# EAGLE board DualSerialHBridge-1.0 (EAGLE 6.4)
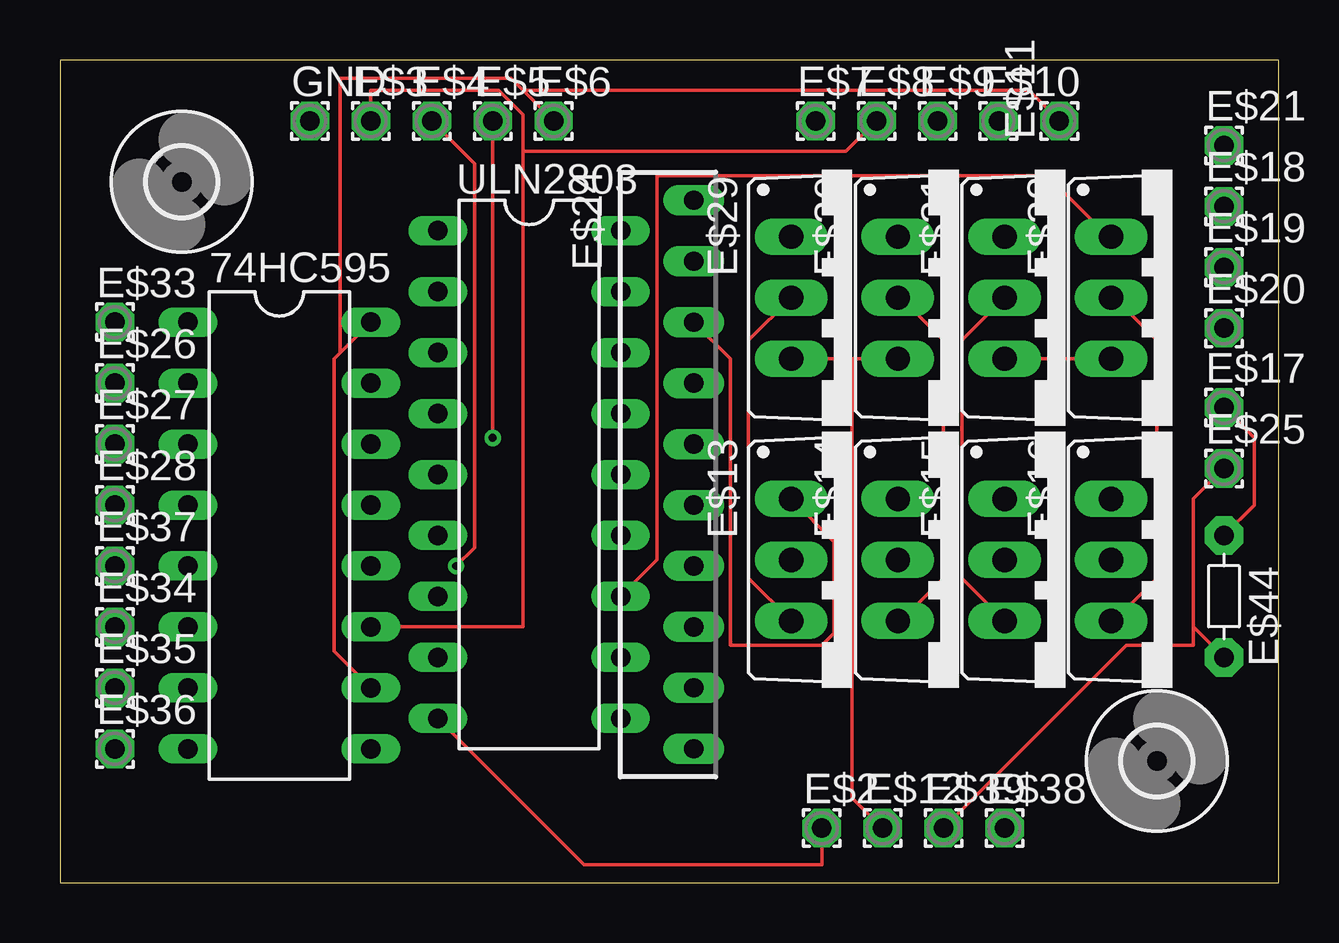
[diagram p0: board, top side]
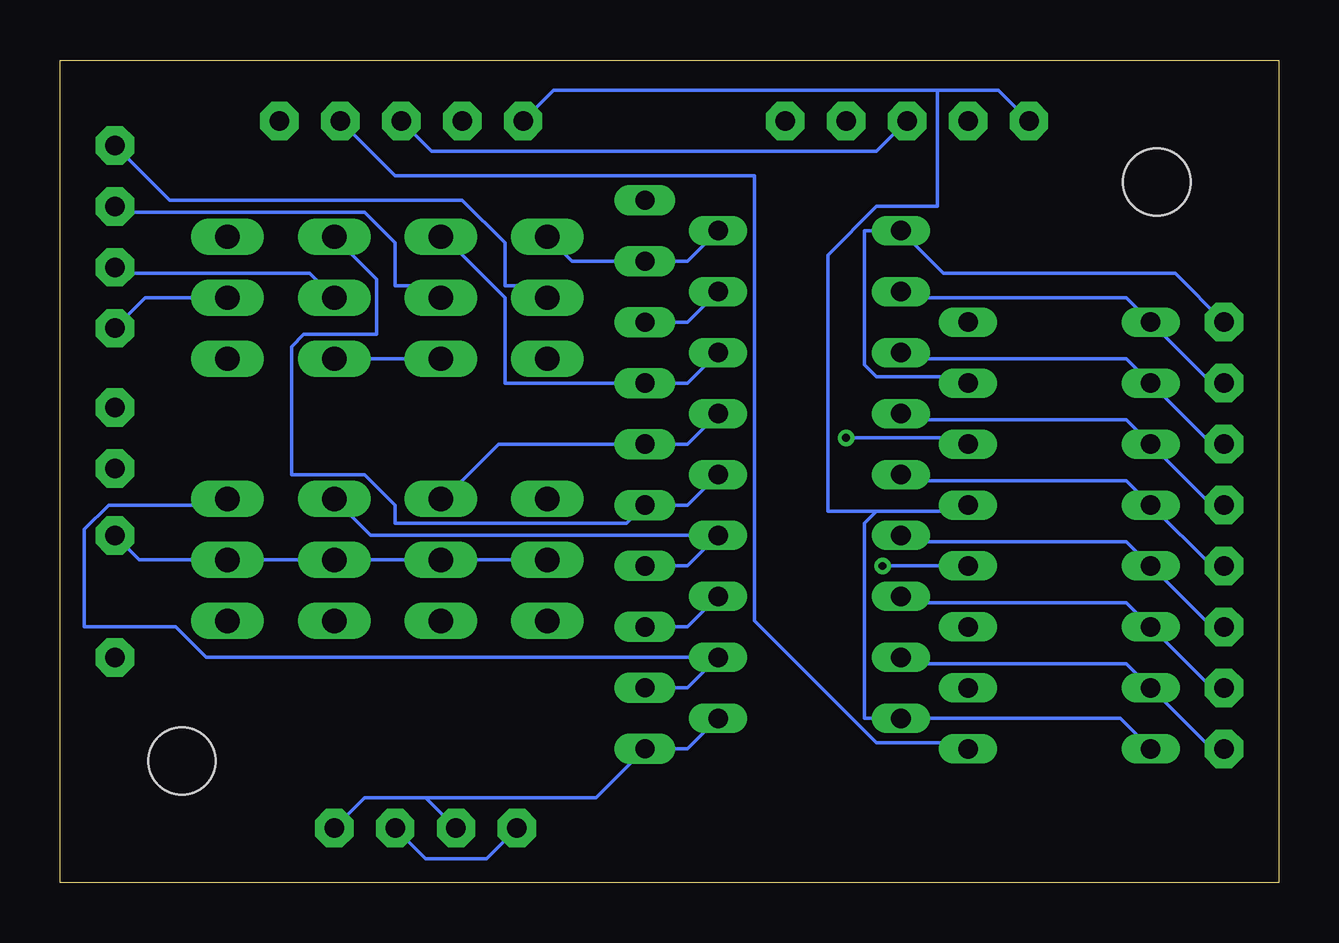
[diagram p1: board, bottom side, seen from below]

Size 50.8 x 34.29 mm. Coordinates in mm from the lower left corner, seen from the top.
Outline: 0,34.29 0,0 50.8,0 50.8,34.29 0,34.29
Copper layers (1*16): Top 0.0356mm / dielectric 1.5011mm / Bottom 0.0356mm
Design rules "LaenPCBOrder": minimum track width 6mil, minimum drill 13mil, track to track 6mil, track to pad 6mil, pad to pad 6mil, via to via 6mil, smd to smd 6mil, copper to edge 15mil, drill to drill 6mil, minimum pad ring 7mil, minimum via ring 7mil, stop-mask expansion 4mil, vias tented up to drill 0mil, thermal gap 10mil

## Footprints (pad centres in the part's own frame; a part is rotated, then mirrored left to right if it is on the bottom)
DIL16 = drill 0.813 long: 1 -8.89,-3.81; 2 -6.35,-3.81; 3 -3.81,-3.81; 4 -1.27,-3.81; 5 1.27,-3.81; 6 3.81,-3.81; 7 6.35,-3.81; 8 8.89,-3.81; 9 8.89,3.81; 10 6.35,3.81; 11 3.81,3.81; 12 1.27,3.81; 13 -1.27,3.81; 14 -3.81,3.81; 15 -6.35,3.81; 16 -8.89,3.81
1,6/0,8 = drill 0.813 pad 1.6 octagon: 1 0,0
TO220V = drill 1.016 long: 1 -2.54,-2.54; 2 0,-2.54; 3 2.54,-2.54
SIP-10 = drill 0.8 pad 1.27 long: 1 -11.43,0; 2 -8.89,0; 3 -6.35,0; 4 -3.81,0; 5 -1.27,0; 6 1.27,0; 7 3.81,0; 8 6.35,0; 9 8.89,0; 10 11.43,0
2,8 = hole 2.8: 0,0
R-5 = drill 0.813 pad 1.6 octagon: 1 -2.54,0; 2 2.54,0
DIL18 = drill 0.813 long: 1 -10.16,-3.81; 2 -7.62,-3.81; 3 -5.08,-3.81; 4 -2.54,-3.81; 5 0,-3.81; 6 2.54,-3.81; 7 5.08,-3.81; 8 7.62,-3.81; 9 10.16,-3.81; 10 10.16,3.81; 11 7.62,3.81; 12 5.08,3.81; 13 2.54,3.81; 14 0,3.81; 15 -2.54,3.81; 16 -5.08,3.81; 17 -7.62,3.81; 18 -10.16,3.81

## Placement (x,y rotation side)
74HC595  74HC595  [DIL16]  9.14,14.48 270 top
E$2  [1,6/0,8]  31.75,2.29 0 top
E$3  [1,6/0,8]  12.95,31.75 0 top
E$4  [1,6/0,8]  15.49,31.75 0 top
E$5  [1,6/0,8]  18.03,31.75 0 top
E$6  [1,6/0,8]  20.57,31.75 0 top
E$7  [1,6/0,8]  31.5,31.75 0 top
E$8  [1,6/0,8]  34.04,31.75 0 top
E$9  [1,6/0,8]  36.58,31.75 0 top
E$10  [1,6/0,8]  39.12,31.75 0 top
E$11  [1,6/0,8]  41.66,31.75 90 top
E$12  [1,6/0,8]  34.29,2.29 0 top
E$13  [TO220V]  33.02,13.46 270 top
E$14  [TO220V]  37.47,13.46 270 top
E$15  [TO220V]  41.91,13.46 270 top
E$16  [TO220V]  46.35,13.46 270 top
E$17  [1,6/0,8]  48.51,19.81 0 top
E$18  [1,6/0,8]  48.51,28.19 0 top
E$19  [1,6/0,8]  48.51,25.65 0 top
E$20  [1,6/0,8]  48.51,23.11 0 top
E$21  [1,6/0,8]  48.51,30.73 0 top
E$24  [SIP-10]  26.42,17.02 270 top
E$25  [1,6/0,8]  48.51,17.27 0 top
E$26  [1,6/0,8]  2.29,20.83 0 top
E$27  [1,6/0,8]  2.29,18.29 0 top
E$28  [1,6/0,8]  2.29,15.75 0 top
E$29  [TO220V]  33.02,24.38 270 top
E$30  [TO220V]  37.47,24.38 270 top
E$31  [TO220V]  41.91,24.38 270 top
E$32  [TO220V]  46.35,24.38 270 top
E$33  [1,6/0,8]  2.29,23.37 0 top
E$34  [1,6/0,8]  2.29,10.67 0 top
E$35  [1,6/0,8]  2.29,8.13 0 top
E$36  [1,6/0,8]  2.29,5.59 0 top
E$37  [1,6/0,8]  2.29,13.21 0 top
E$38  [1,6/0,8]  39.37,2.29 0 top
E$39  [1,6/0,8]  36.83,2.29 0 top
E$40  [2,8]  5.08,29.21 0 top
E$42  [2,8]  45.72,5.08 0 top
E$44  [R-5]  48.51,11.94 270 top
GND  [1,6/0,8]  10.41,31.75 0 top
ULN2803  ULN2803  [DIL18]  19.56,17.02 270 top

## Library data of the parts
74HC595 = 74xx-us
E$2-E$12 E$17-E$21 E$25-E$28 E$33-E$39 GND = wirepad
E$13-E$16 E$29-E$32 = transistor-pnp
E$24 = linear
E$40 E$42 = holes
E$44 = discrete
ULN2803 = 40xx

## Nets
S$1: E$12.1 E$24.10 E$29.3 E$30.3 E$31.3 E$32.3 E$38.1 ULN2803.10
S$2: 74HC595.10 74HC595.16 E$6.1 E$11.1
S$3: 74HC595.11 E$3.1 E$8.1
S$4: 74HC595.12 E$4.1 E$9.1
S$5: 74HC595.14 E$5.1
S$6: E$24.2 E$29.1 ULN2803.18
S$7: E$24.6 E$31.1 ULN2803.14
S$8: E$13.1 E$24.3 ULN2803.17
S$9: E$24.4 E$30.1 ULN2803.16
S$10: E$14.1 E$24.5 ULN2803.15
S$11: 74HC595.15 E$33.1 ULN2803.1
S$12: 74HC595.8 74HC595.13 E$2.1 E$7.1 E$25.1 E$39.1 E$44.2 GND.1 ULN2803.9
S$13: E$15.1 E$24.7 ULN2803.13
S$14: E$24.8 E$32.1 ULN2803.12
S$15: E$16.1 E$24.9 ULN2803.11
S$16: 74HC595.1 E$26.1 ULN2803.2
S$17: 74HC595.2 E$27.1 ULN2803.3
S$18: 74HC595.3 E$28.1 ULN2803.4
S$19: 74HC595.4 E$37.1 ULN2803.5
S$20: 74HC595.5 E$34.1 ULN2803.6
S$21: 74HC595.6 E$35.1 ULN2803.7
S$22: 74HC595.9 E$10.1
S$23: 74HC595.7 E$36.1 ULN2803.8
S$24: E$13.2 E$14.2 E$15.2 E$16.2 E$17.1 E$44.1
S$25: E$13.3 E$21.1 E$29.2
S$26: E$14.3 E$18.1 E$30.2
S$27: E$15.3 E$19.1 E$31.2
S$28: E$16.3 E$20.1 E$32.2

## Tracks (layer width: path | path; a pad name or v marks a point on that pad's centre or on a via)
S$1
  Top 0.152: E$30.3 33.02,21.84 | 33.02,21.84 E$29.3 | E$32.3 E$31.3 | 33.02,21.84 33.02,3.56 E$12.1
  Bottom 0.152: E$31.3 E$30.3 | ULN2803.10 24.64,5.59 E$24.10 28.45,3.56 35.56,3.56 | 35.56,3.56 E$12.1 | 35.56,3.56 38.1,3.56 E$38.1
S$2
  Top 0.152: 74HC595.10 11.43,9.65 11.43,21.84 11.68,22.1 | 74HC595.16 11.68,22.1 | 19.3,33.02 18.8,33.53 11.68,33.53 11.68,22.1 | 19.3,33.02 E$6.1 | E$11.1 40.39,33.02 19.3,33.02
S$3
  Top 0.152: 74HC595.11 19.3,10.67 19.3,30.48 | 19.3,30.48 19.3,32 18.29,33.02 12.95,33.02 E$3.1 | E$8.1 32.77,30.48 19.3,30.48
S$4  (via drill 0.33)
  Top 0.152: v16.51,13.21 17.27,13.97 17.27,29.97 E$4.1
  Bottom 0.152: v16.51,13.21 74HC595.12 | E$9.1 35.31,30.48 16.76,30.48 E$4.1
S$5  (via drill 0.33)
  Top 0.152: E$5.1 v18.03,18.54
  Bottom 0.152: 74HC595.14 13.21,18.54 v18.03,18.54
S$6
  Bottom 0.152: ULN2803.18 24.64,25.91 E$24.2 29.46,25.91 E$29.1
S$7
  Bottom 0.152: ULN2803.14 24.64,15.75 E$24.6 27.18,14.99 36.83,14.99 36.83,15.75 38.1,17.02 41.15,17.02 41.15,22.35 40.64,22.86 37.59,22.86 37.59,25.15 E$31.1
S$8
  Top 0.152: E$13.1 32.26,14.22 32.26,10.41 31.75,9.91 27.94,9.91 27.94,21.84 E$24.3
  Bottom 0.152: ULN2803.17 24.64,23.37 E$24.3
S$9
  Bottom 0.152: ULN2803.16 24.64,20.83 E$24.4 32.26,20.83 32.26,24.38 34.8,26.92 E$30.1
S$10
  Bottom 0.152: ULN2803.15 24.64,18.29 E$24.5 32.51,18.29 34.8,16 E$14.1
S$11
  Bottom 0.152: 74HC595.15 13.21,21.08 16.76,21.08 17.27,21.59 17.27,27.18 ULN2803.1 13.97,25.4 4.32,25.4 E$33.1
S$12
  Top 0.152: 47.24,10.67 E$44.2 | 47.24,10.67 47.24,16 E$25.1 | E$39.1 44.45,9.91 47.24,9.91 47.24,10.67 | ULN2803.9 21.84,0.76 31.75,0.76 E$2.1
  Bottom 0.152: GND.1 11.68,33.02 14.22,33.02 | 14.22,33.02 30.23,33.02 E$7.1 | 74HC595.8 6.6,6.86 ULN2803.9 17.27,6.86 17.27,14.99 16.76,15.49 | 74HC595.13 13.21,15.49 16.76,15.49 | E$2.1 33.02,1.02 35.56,1.02 E$39.1 | 14.22,33.02 14.22,28.19 16.76,28.19 18.8,26.16 18.8,15.49 16.76,15.49
S$13
  Bottom 0.152: E$24.7 24.64,13.21 ULN2803.13 37.85,14.48 E$15.1
S$14
  Top 0.152: ULN2803.12 24.89,13.46 24.89,29.46 41.15,29.46 43.69,26.92 E$32.1
  Bottom 0.152: ULN2803.12 24.64,10.67 E$24.8
S$15
  Bottom 0.152: E$24.9 24.64,8.13 ULN2803.11 44.7,9.4 45.97,10.67 49.78,10.67 49.78,14.73 48.77,15.75 44.2,15.75 43.94,16 E$16.1
S$16
  Bottom 0.152: E$26.1 2.79,20.83 74HC595.1 6.35,24.38 15.49,24.38 ULN2803.2
S$17
  Bottom 0.152: E$27.1 2.79,18.29 74HC595.2 6.35,21.84 15.49,21.84 ULN2803.3
S$18
  Bottom 0.152: E$28.1 2.79,15.75 74HC595.3 6.35,19.3 15.49,19.3 ULN2803.4
S$19
  Bottom 0.152: E$37.1 2.79,13.21 74HC595.4 6.35,16.76 15.49,16.76 ULN2803.5
S$20
  Bottom 0.152: E$34.1 2.79,10.67 74HC595.5 6.35,14.22 15.49,14.22 ULN2803.6
S$21
  Bottom 0.152: E$35.1 2.79,8.13 74HC595.6 6.35,11.68 15.49,11.68 ULN2803.7
S$22
  Bottom 0.152: 74HC595.9 13.21,5.84 16.76,5.84 21.84,10.92 21.84,29.46 36.83,29.46 E$10.1
S$23
  Bottom 0.152: E$36.1 2.79,5.59 74HC595.7 6.35,9.14 15.49,9.14 ULN2803.8
S$24
  Top 0.152: E$17.1 49.78,18.54 49.78,15.75 E$44.1
  Bottom 0.152: E$13.2 E$14.2 E$15.2 E$16.2 47.5,13.46 E$44.1
S$25
  Top 0.152: E$13.3 28.7,12.7 28.7,22.61 E$29.2
  Bottom 0.152: E$21.1 46.23,28.45 34.04,28.45 32.26,26.67 32.26,24.89 30.99,24.89 E$29.2
S$26
  Top 0.152: E$14.3 35.05,10.92 36.83,12.7 36.83,22.61 35.05,24.38 E$30.2
  Bottom 0.152: E$18.1 48.26,27.94 38.1,27.94 36.83,26.67 36.83,24.89 35.56,24.89 35.05,24.38 E$30.2
S$27
  Top 0.152: E$15.3 37.59,12.7 37.59,22.61 E$31.2
  Bottom 0.152: E$19.1 48.26,25.4 40.39,25.4 E$31.2
S$28
  Top 0.152: E$16.3 43.94,10.92 45.72,12.7 45.72,22.61 43.94,24.38 E$32.2
  Bottom 0.152: E$20.1 47.24,24.38 E$32.2

## Text on the board
tNames: Serial In | Serial Out | GND | SHCP | STCP | DSI | VCC | GND | SHCP | STCP | DSO | VCC | O1 | O2 | O3 | Power Out | H1 | O4 | L1 | REF | H2 | S | Sense Out | L2 | H3 | Shunt | L3 | H4 | 1 | L4 | Power | Parallel In | Dual Parallel/Serial H-Bridge | GND | VDD | GND | VDD | Brent M. Spell